# Altium PCB RelayBoard.PcbDoc
Units mil, origin at the board's own origin, x right, y up, seen from the top; angles counter-clockwise.
Board outline 1574.8 x 315.04 mil, 2 copper layers (Top Layer, Bottom Layer); 4 components, 5 nets, 12 pads, 0 vias.
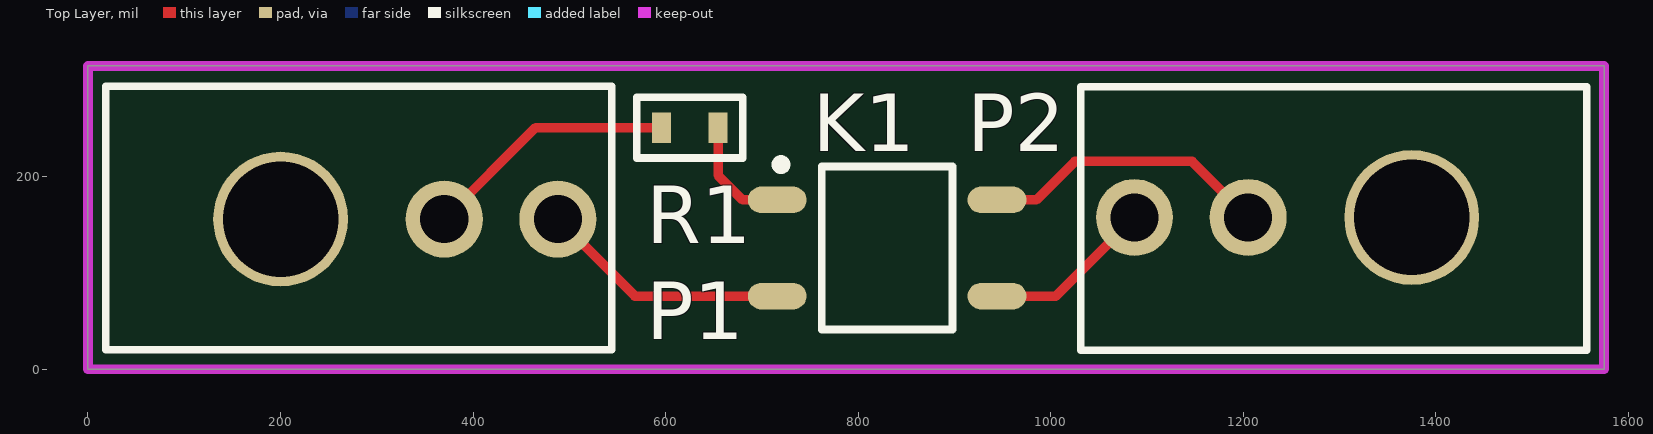
[diagram p0: Top Layer view]
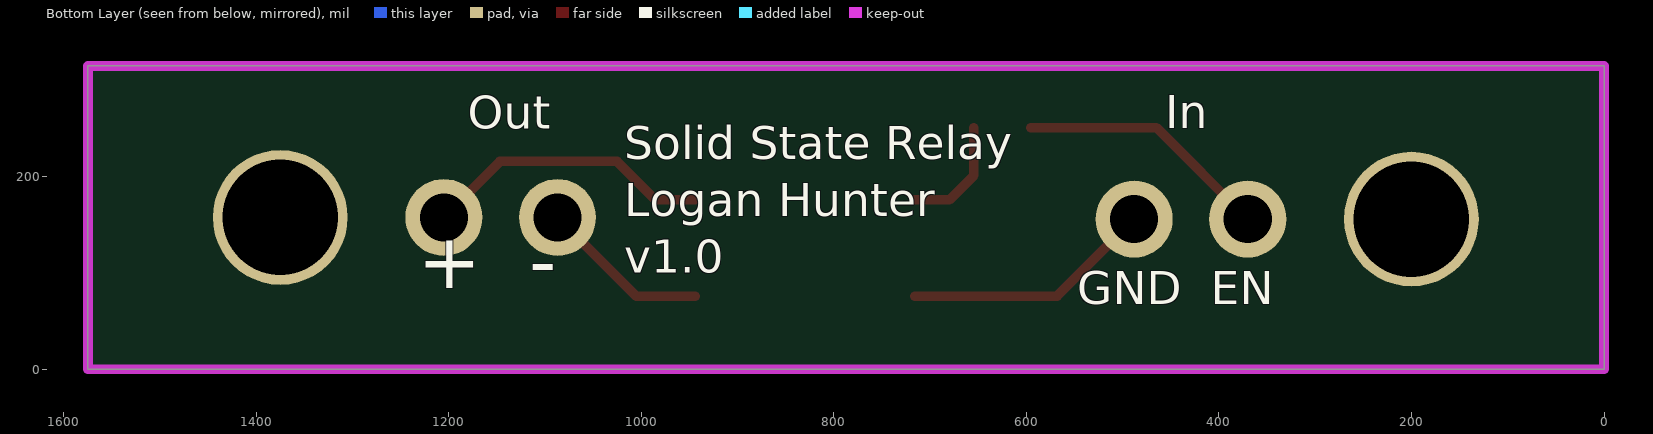
[diagram p1: Bottom Layer view, seen from below]
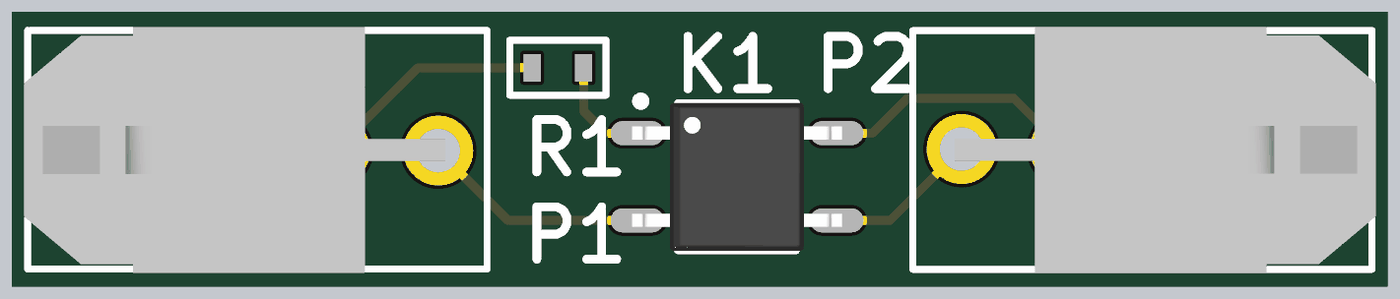
[diagram p2: 3D render of the assembled board from above, using the file's embedded part models]

## Layer stack, top to bottom
Top Solder: solder mask 0.4, Solder Resist, Dk 3.5
Top Layer: signal copper 1.4
Dielectric 1: dielectric 12.6, FR-4, Dk 4.8
Bottom Layer: signal copper 1.4
Bottom Solder: solder mask 0.4, Solder Resist, Dk 3.5

## Board outline
0,-0.08 1574.8,-0.08 1574.8,314.96 0,314.96

## Design rules (kind name [scope] priority, off if disabled: settings)
BoardOutlineClearance [All] p1: gap=11.81 ignorepadtopadclearanceinfootprint=FALSE
Clearance [All] p1: gap=6 ignorepadtopadclearanceinfootprint=FALSE except(0: Arc-Hole Track-Hole SMDPad-Hole THPad-Hole Via-Hole Fill-Hole Poly-Hole Region-Hole Text-Hole)
ComponentClearance [All] p1: gap=3.94 collisioncheckmode=3 verticalgap=10 showdistances=FALSE
FabricationTestPointUsage TestPointUsage [All] p1: valid=0 allowmultiple=FALSE
FabricationTestpoint Testpoint [All] p1: side=3 testpointundercomponent=TRUE minsize=40 maxsize=100 preferedsize=60 minholesize=0 maxholesize=40 preferedholesize=32 testpointgrid=1 allowsidetop=TRUE allowsidebottom=TRUE usegrid=TRUE gridtolerance=0.01
HoleSize [All] p1: absolutevalues=TRUE maxlimit=248.03 minlimit=11.81 maxpercent=80.000 minpercent=20.000
HoleToHoleClearance [All] p1: gap=17.72 allowstackedmicrovias=TRUE
MinimumAnnularRing [All] p1: minimumring=5.91
MinimumSolderMaskSliver [All] p1: minsoldermaskwidth=2.95
PlaneClearance [All] p1: clearance=19.68
PlaneConnect [All] p1: planeconnectstyle=Direct reliefexpansion=20 reliefentries=4 reliefconductorwidth=10 reliefairgap=10
PolygonConnect "GND Via" [isVia AND InNet('GND')] p1: connectstyle=Direct reliefconductorwidth=10 reliefentries=4 polygonreliefangle="90 Angle" airgapwidth=10 // GND Via Connection
PolygonConnect [All] p2: connectstyle=Relief reliefconductorwidth=10 reliefentries=4 polygonreliefangle="90 Angle" airgapwidth=9.84
RoutingVias [All] p1: holewidth=11.81 width=23.62 viastyle="Through Hole" minholewidth=11.81 minwidth=23.62 maxholewidth=248.03 maxwidth=259.84
SilkToSilkClearance [All] p1: silktosilkclearance=5.91
SilkToSolderMaskClearance SilkscreenOverComponentPads [IsPad] p1: minsilkscreentomaskgap=9.84 clearancetoexposedcopper=TRUE
SolderMaskExpansion [All] p1: expansion=3.94
Width [All] p1: maxlimit=78.74 minlimit=6 preferedwidth=9.84 minimp=50.000000 maximp=50.000000 favimp=50.000000
20 further rules are at their usual default settings.

## Components (designator, comment, footprint, x,y, rotation, side; value= is the part's Value field where it differs from the comment)
K1 "SPST-NO Solid State Relay" "SPST-NO Solid State Relay - IXYS" 830.08,125.91 r0 top
P1 "Molex Microfit 1x2" PCB_MLX_MICROFIT_1X2 280.08,155.91 r270 top
P2 "Molex Microfit 1x2" PCB_MLX_MICROFIT_1X2 1295.08,157.64 r90 top
R1 "SCH_GENERIC_RESISTOR_0603" PCB_GENERIC_SMD_0603 625.08,250.91 r180 top

## Footprints (in the part's own frame and the unit in brackets; to place one, negate y for a bottom-side part, rotate by r counter-clockwise, add the part's x,y. Pads: shape width x height; smd on the part's side, far side on the other; paste and mask are expansions set on the pad)
PCB_GENERIC_SMD_0603 [mm]
  rect 0.5x0.8 smd: 1(-0.75,0) 2(0.75,0)
  silkscreen extent -1.4,-0.8 1.4,0.8, body extent -0.75,-0.5 0.75,0.5, height 0.45
PCB_MLX_MICROFIT_1X2 [mil]
  round 80 hole 50: 1(0,90) 2(0,208)
  round 140 hole 120: ""(0,-80)
  silkscreen extent -138,-262 136,264, body extent -141,-266 140,216, height 345
"SPST-NO Solid State Relay - IXYS" [mm] "Digikey: CLA233CT-ND / MFG: CPC1017NTR"
  oval 1.55x0.7 smd: 1(-2.9,1.27) 2(-2.9,-1.27) 3(2.9,-1.27) 4(2.9,1.27)
  silkscreen extent -2.92,-2.15 1.73,2.32, body extent -3.05,-2.15 3.05,2.15, height 2.18

## Part data
P1 P2: library part SCH_MLX_1X2
R1: "Generic SMD resistor 0603"

## Nets (pads, with @x,y where several pads share a name; then routed paths per layer and width w, separated by ;. In a path a pad name is that pad's centre, name@x,y a point inside that pad or via, vN(x,y) a via of type N, cw(c..) or ccw(c..) an arc to the next point about the centre after c; other vN are vias at no path point)
NetK1_1: K1.1 R1.1 | length 121.4
  Top Layer w10: R1.1 654.61,201.38 680.08,175.91 K1.1
NetK1_2: K1.2 P1.2 | length 261
  Top Layer w10: P1.2 568.08,75.91 K1.2
NetK1_3: K1.3 P2.2 | length 176.7
  Top Layer w10: K1.3 1005.35,75.91 P2.2
NetK1_4: K1.4 P2.1 | length 301.5
  Top Layer w10: K1.4 985.08,175.91 1025.08,215.91 1146.81,215.91 P2.1
NetP1_1: P1.1 R1.2 | length 264.8
  Top Layer w10: P1.1 465.08,250.91 R1.2
pads on no net: P1. P2.

## Keep-outs
Keep-Out Layer:
  the board outline again, w10

## Silkscreen, mask and mechanical layers (free items; w line width, h text height)
Bottom Overlay:
  text "In" at 455.71,238.84 h59.06
  text "Out" at 1180.12,238.19 h59.06
  text "Solid State Relay / Logan Hunter / v1.0" at 1017.72,88.58 h59.06
  text "+  -" at 1232.28,64.96 h98.43
  text "GND  EN" at 547.24,56.1 h59.06